# Altium PCB ControleSTM.PcbDoc (part 2 of 3)
Units mm, origin at the board's own origin, x right, y up, seen from the top; angles counter-clockwise.
Board outline 69.32 x 31.88 mm, 2 copper layers (Top Layer, Bottom Layer); 62 components, 48 nets, 242 pads, 79 vias.
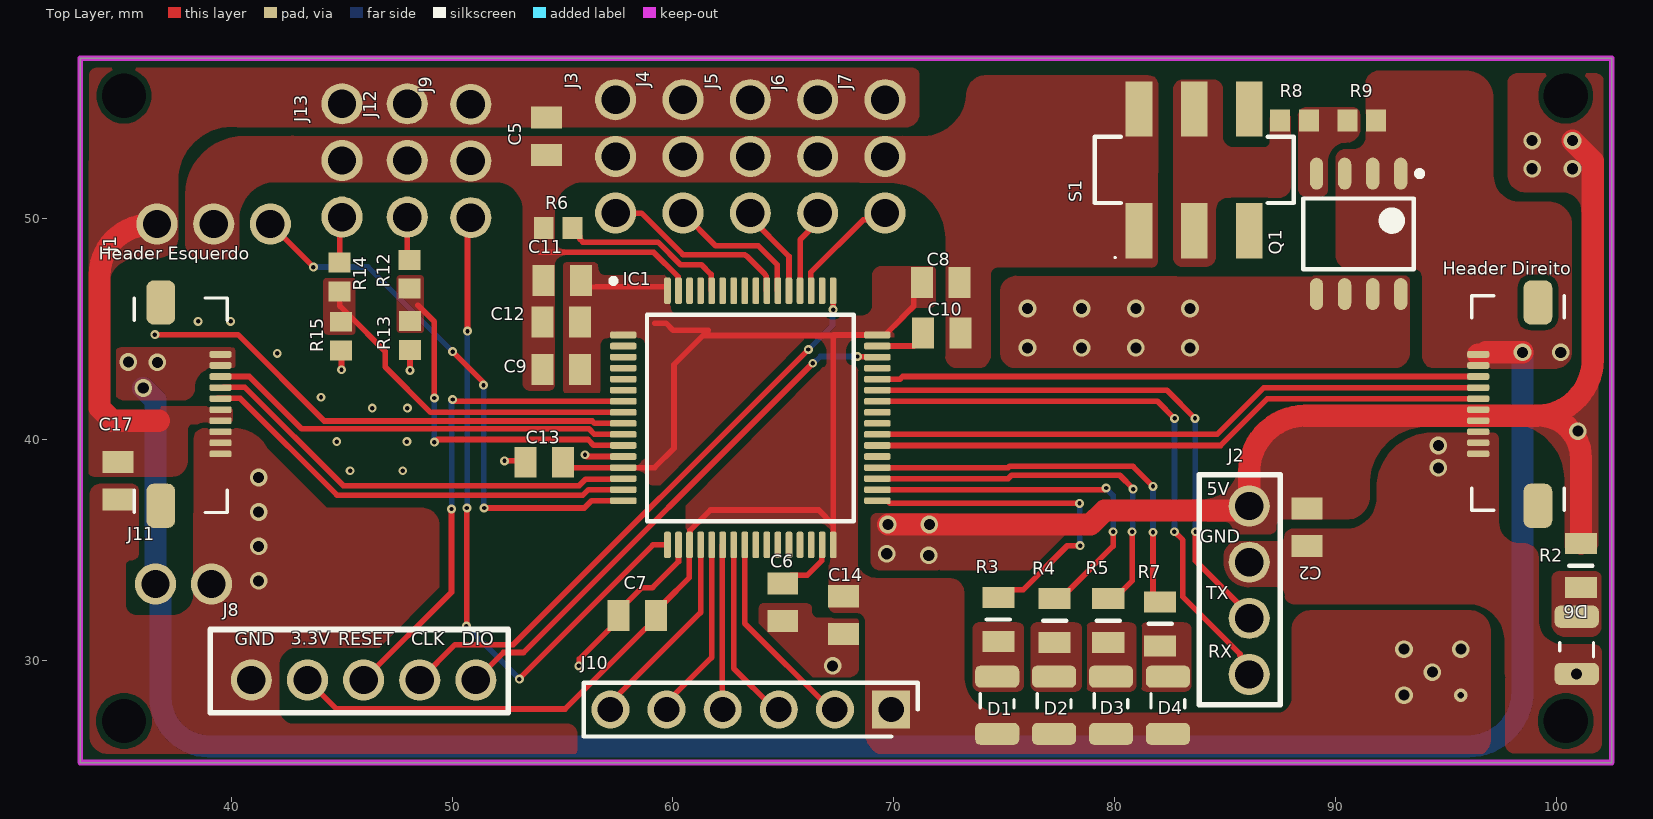
[diagram p0: Top Layer view]

## Polygon pours and split planes (outlines as drawn) (continued)
VSS on Top Layer "VSS_L01_P318" (solid, pour order 318): 94.55,40.362 ccw(c94.531,40.056) 94.225,40.075 94.225,38.515 cw(c91.685,38.515) 91.685,35.975 88.05,35.975 ccw(c88.05,35.6) 87.675,35.6 cw(c87.5,35.6) 87.5,35.425 85.625,35.425 ccw(c85.625,34.725) 84.925,34.725 84.925,34.475 ccw(c86.075,34.475) 86.075,33.325 87.35,33.325 cw(c87.35,32.975) 87.7,32.975 ccw(c88.075,32.95) 88.05,32.575 96.05,32.575 cw(c95.98,30.918) 97.638,30.848 ccw(c97.638,31.511) 98.3,31.511 98.3,34.05 cw(c98.3,34.966) 97.384,34.966 97.384,40.016 ccw(c97.037,40.016) 97.037,40.362
5V on Top Layer "5V_L01_P317" (solid, pour order 317): 84.175,36.3 84.925,36.3 cw(c84.925,35.85) 85.375,35.85 ccw(c85.5,35.85) 85.5,35.725 87,35.725 ccw(c87,36.025) 87.3,36.025 87.3,36.075 cw(c87.625,36.075) 87.625,36.4 90.5,36.4 ccw(c90.5,37.425) 91.525,37.425 91.525,37.91 cw(c94.132,37.993) 94.05,40.6 94.075,40.45 94.075,41.5 ccw(c94.05,41.5) 94.05,41.525 88.175,41.525 ccw(c88.175,41.5) 88.15,41.5 85.625,39 cw(c83.925,39) 83.925,37.3 83.35,37.3
VSS on Top Layer "VSS_L01_P316" (solid, pour order 316): 68.4,31.775 ccw(c68.225,31.775) 68.225,31.95 66.575,31.95 cw(c66.575,32.25) 66.275,32.25 66.275,32.4 ccw(c66.075,32.4) 66.075,32.6 64.075,32.6 ccw(c64.075,32.4) 63.875,32.4 63.875,31.7 66.325,29.25 67.95,29.25 ccw(c67.95,29.7) 68.4,29.7
VDD on Top Layer "VDD_L01_P315" (solid, pour order 315): 59.423,37.949 59.076,37.949 cw(c59.076,38.15) 58.875,38.15 ccw(c58.425,38.15) 58.425,38.6 58.175,38.6 cw(c58.175,38.725) 58.05,38.725 58.225,38.9 ccw(c58.113,39.712) 58.925,39.825 cw(c59.075,39.825) 59.075,39.975 59.8,39.975
VDD on Top Layer "VDD_L01_P314" (solid, pour order 314): 68.25,34.75 ccw(c69.25,34.75) 69.25,33.75 69.625,33.75 69.625,33.325 cw(c69.25,33.325) 69.25,32.95 cw(c69.25,34.801) 67.399,34.801 67.399,34.891
VDD on Top Layer "VDD_L01_P310" (solid, pour order 310): 68.6,44.625 68.475,44.625 ccw(c68.431,44.024) 67.83,44.067 67.125,43.875 ccw(c66.4,43.875) 66.4,44.6 65.575,44.6 cw(c65.575,44.719) 65.456,44.719 65.456,45.085 69.74,45.085 70.025,44.8 70.025,44.65
5V on Top Layer "5V_L01_P301" (solid, pour order 301): 72,36.675 69.2,36.675 ccw(c69.2,36.425) 68.95,36.425 68.95,34.525 ccw(c69.375,34.525) 69.375,34.1 71.9,34.1 ccw(c71.9,34.525) 72.325,34.525 72.325,34.675 cw(c73.325,34.675) 73.325,35.675 ccw(c73.325,35.975) 73.625,35.975 73.625,36.6
VSS on Top Layer "VSS_L01_P292" (solid, pour order 292): 33.6,37.025 33.6,37.475 cw(c34.15,37.475) 34.15,38.025 35.475,38.025 cw(c35.475,37.675) 35.825,37.675 35.825,34.9 cw(c35.475,34.9) 35.475,34.55 ccw(c35.475,34.3) 35.225,34.3 35.225,32.575 ccw(c35.725,32.575) 35.725,32.075 37.2,32.075 ccw(c37.325,33.05) 38.3,32.925 38.3,36.675 38.95,36.7 cw(c38.95,34.6) 41.05,34.6 41.05,29.713 cw(c39.564,29.713) 39.564,28.227 36.548,28.227 cw(c36.548,28.9) 35.875,28.9 ccw(c34.95,28.9) 34.95,29.825 34.375,29.825 cw(c34.375,30.6) 33.6,30.6 33.6,32.175
5V on Top Layer "5V_L01_P291" (solid, pour order 291): 38.031,40.429 38.031,39.056 cw(c37.3,39.056) 37.3,38.325 33.875,38.325 cw(c33.875,38.725) 33.475,38.725 33.475,41.875 cw(c33.912,41.888) 33.9,42.325 34,42.475 cw(c34,42.05) 34.425,42.05 ccw(c35.425,42.05) 35.425,41.05 36.075,41.05
5V on Top Layer "5V_L01_P289" (solid, pour order 289): 33.45,47.85 33.45,51.975 cw(c35.325,51.975) 35.325,53.85 35.6,53.85 ccw(c35.6,55.45) 37.2,55.45 37.2,55.7 cw(c38.35,55.7) 38.35,56.85 70.8,56.85 cw(c70.8,56.5) 71.15,56.5 71.15,54.775 cw(c70.525,54.775) 70.525,54.15 40.275,54.15 ccw(c40.012,51.75) 37.612,52.012 37.612,49.188 cw(c36.65,49.187) 36.65,48.225 35.75,48.225 ccw(c35.75,46.925) 34.45,46.925 ccw(c34.2,46.925) 34.2,47.175 33.65,47.175
5V on Top Layer "5V_L01_P287" (solid, pour order 287): 37.374,41.529 36.879,41.529 ccw(c36.879,41.475) 36.825,41.475 cw(c36.7,41.475) 36.7,41.35 35.825,41.35 35.825,40.375 37.925,40.375 ccw(c37.925,40.5) 38.05,40.5 cw(c38.266,40.5) 38.266,40.716 38.636,40.716 cw(c38.636,41.002) 38.35,41.002 38.35,41.225
5V on Top Layer "5V_L01_P277" (solid, pour order 277): 101.879,43.688 101.879,35.331 cw(c101.397,35.331) 101.397,34.849 100.711,34.849 cw(c100.711,35.204) 100.355,35.204 100.355,38.202 ccw(c97.815,38.202) 97.815,40.742 96.393,40.742 cw(c96.393,41.148) 95.987,41.148 cw(c96.368,41.148) 96.368,41.529 99.187,41.529 ccw(c99.187,43.739) 101.397,43.739
VDD on Top Layer "VDD_L01_P252" (solid, pour order 252): 58.403,44.635 cw(c58.403,44.288) 58.75,44.288 58.75,38.862 ccw(c58.862,38.862) 58.862,38.75 59.172,38.75 59.325,37.85 65.987,44.6 65.456,45.085 60.081,45.085 59.708,45.458 59.589,45.339 58.471,45.339
NetR8_1 on Top Layer "NETR8_1_L01_P242" (solid, pour order 242): 87.005,54.518 cw(c87.183,54.518) 87.183,54.696 87.843,54.696 cw(c87.843,54.569) 87.97,54.569 87.97,51.521 cw(c87.411,51.521) 87.411,50.962 85.1,50.962 ccw(c85.1,50.429) 84.567,50.429 84.567,48.321 cw(c84.084,48.321) 84.084,47.838 83.043,47.838 cw(c83.043,48.245) 82.636,48.245 82.636,55.865 cw(c83.068,55.865) 83.068,56.296 84.49,56.296 cw(c84.49,55.915) 84.871,55.915 84.871,53.731 ccw(c85.354,53.731) 85.354,53.248 86.744,53.248 ccw(c86.751,53.503) 87.005,53.496
VSS on Top Layer "VSS_L01_P041" (solid, pour order 41): 70.325,53.75 cw(c70.391,53.097) 71.044,53.162 71.044,52.095 cw(c70.612,52.095) 70.612,51.664 41.326,51.664 cw(c41.326,52.451) 40.538,52.451 40.538,53.061 cw(c41.164,53.124) 41.1,53.75
VSS on Top Layer "VSS_L01_P226" (solid, pour order 226): 42.727,51.717 42.275,51.675 ccw(c42.08,49.97) 40.375,50.165 40.375,48.825 cw(c39.725,48.825) 39.725,48.175 38.675,48.175 cw(c38.675,48.925) 37.925,48.925 37.925,50.925 cw(c40.613,51.062) 40.475,53.75 42.65,53.75 cw(c42.772,53.095) 43.427,53.217
VSS on Top Layer "VSS_L01_P251" (solid, pour order 251): 69.571,51.638 69.799,51.638 cw(c69.799,49.098) 72.339,49.098 72.339,47.574 ccw(c72.441,47.574) 72.441,47.473 74.371,47.473 cw(c74.707,47.473) 74.707,47.808 81.117,47.808 cw(c81.117,47.844) 81.081,47.844 81.081,56.508 74.187,56.508 ccw(c74.187,55.601) 73.279,55.601 cw(c71.289,55.74) 71.15,53.75 70.325,53.75
VSS on Top Layer "VSS_L01_P188" (solid, pour order 188): 80.366,55.347 cw(c78.854,55.181) 79.019,53.67 69.164,53.67 ccw(c69.164,52.781) 68.275,52.781 68.275,51.867 ccw(c68.504,51.867) 68.504,51.638 79.019,51.638 cw(c79.019,50.292) 80.366,50.292 ccw(c80.89,51.034) 81.509,50.368 81.509,55.347
VSS on Top Layer "VSS_L01_P142" (solid, pour order 142): 81.514,56.502 80.649,56.515 ccw(c80.643,56.169) 80.298,56.168 80.321,48.146 ccw(c80.645,48.147) 80.635,47.824 81.598,47.793 ccw(c81.609,48.133) 81.949,48.132 81.972,56.036 ccw(c81.507,56.037)
NetC1_2 on Top Layer "NETC1_2_L01_P197" (solid, pour order 197): 90.068,47.396 93.167,47.396 cw(c93.167,47.219) 93.345,47.219 93.345,43.967 cw(c92.608,43.967) 92.608,43.231 75.565,43.231 cw(c75.565,43.993) 74.803,43.993 74.803,46.685 cw(c75.54,46.685) 75.54,47.422
5V on Top Layer "5V_L01_P247" (solid, pour order 247): 36.982,40.716 cw(c36.982,41.123) 36.576,41.123 37.008,41.123 ccw(c37.008,41.326) 37.211,41.326 cw(c37.414,41.326) 37.414,41.529 39.98,41.529 cw(c39.98,41.427) 40.081,41.427 40.081,40.894 cw(c39.903,40.894) 39.903,40.716
VSS on Top Layer "VSS_L01_P201" (solid, pour order 201): 74.371,47.473 ccw(c73.939,47.473) 73.939,47.904 72.669,47.904 ccw(c72.669,47.574) 72.339,47.574 72.339,43.84 ccw(c72.93,43.809) 72.898,43.218 73.749,43.218 ccw(c73.749,43.84) 74.371,43.84
VSS on Top Layer "VSS_L01_P215" (solid, pour order 215): 39.225,40.521 38.785,40.521 ccw(c38.785,40.049) 38.314,40.049 38.314,29.614 ccw(c39.7,29.614) 39.7,28.227 41.256,28.227 ccw(c41.256,28.811) 41.841,28.811 41.841,38.837 ccw(c40.157,38.837) 40.157,40.521
NetC1_2 on Top Layer "NETC1_2_L01_P157" (solid, pour order 157): 88.824,47.219 cw(c89.027,47.219) 89.027,47.422 93.142,47.422 cw(c93.142,47.219) 93.345,47.219 93.345,46.025 cw(c93.091,46.025) 93.091,45.771 88.925,45.771 cw(c88.925,45.872) 88.824,45.872
NetQ1_G on Top Layer "NETQ1_G_L01_P169" (solid, pour order 169): 90.755,55.061 cw(c90.755,54.705) 91.11,54.705 91.11,54.095 cw(c90.475,54.095) 90.475,53.46 ccw(c90.475,52.622) 89.637,52.622 89.637,51.352 cw(c89.282,51.352) 89.282,50.997 88.748,50.997 cw(c88.697,51.403) 88.291,51.352 88.291,54.629 cw(c88.697,54.654) 88.671,55.061
VDD on Top Layer "VDD_L01_P154" (solid, pour order 154): 56.896,47.461 cw(c56.914,47.759) 56.617,47.777 56.617,47.828 ccw(c56.413,47.828) 56.413,48.031 55.194,48.031 ccw(c55.194,47.879) 55.042,47.879 55.042,42.291 ccw(c55.321,42.291) 55.321,42.012 56.439,42.012 ccw(c56.439,42.291) 56.718,42.291 56.718,44.323 cw(c56.998,44.323) 56.998,44.602 58.268,44.602 ccw(c58.268,46.228) 59.893,46.228 59.893,47.234 ccw(c59.573,47.141) 59.48,47.461
VSS on Bottom Layer "VSS_L02_P302" (solid, pour order 302): 52.425,47.65 52.425,33.3 cw(c51.538,33.112) 51.725,32.225 38.8,32.225 cw(c38.8,33.125) 37.9,33.125 37.9,46.95 cw(c38.725,46.95) 38.725,47.775 ccw(c38.725,48.075) 39.025,48.075 39.025,48.935 cw(c41.565,48.935) 41.565,51.475 53.2,51.475
VSS on Bottom Layer "VSS_L02_P349" (solid, pour order 349): 83.795,41.478 83.947,41.478 cw(c83.947,41.046) 84.379,41.046 84.379,40.945 ccw(c84.633,40.945) 84.633,40.691 86.512,40.691 ccw(c86.589,41.152) 87.05,41.076 87.05,42.65 85.518,42.65 cw(c85.518,42.951) 85.217,42.951
5V on Bottom Layer "5V_L02_P347" (solid, pour order 347): 97.13,52.713 97.13,47.854 ccw(c98.171,47.854) 98.171,46.812 101.397,46.812 ccw(c101.397,47.498) 102.083,47.498 102.083,51.348
5V on Bottom Layer "5V_L02_P345" (solid, pour order 345): 95.225,54.127 95.936,54.127 cw(c95.936,52.934) 97.13,52.934 ccw(c99.365,52.934) 99.365,50.698 101.346,50.698 ccw(c101.346,51.46) 102.108,51.46 102.108,55.982 ccw(c101.371,55.982) 101.371,56.718 93.472,56.718 cw(c93.447,56.718) 93.447,56.693
VSS on Bottom Layer "VSS_L02_P304" (solid, pour order 304): 76.889,42.95 81.775,42.95 cw(c81.775,42.55) 82.175,42.55 82.175,39.075 cw(c81.4,39.075) 81.4,38.3 78.975,38.3 ccw(c78.975,36.8) 77.475,36.8 cw(c77.475,38.55) 75.725,38.55 75.725,40.175
VSS on Bottom Layer "VSS_L02_P305" (solid, pour order 305): 73.825,32.05 cw(c72.275,32.05) 72.275,30.5 54.462,30.5 cw(c54.462,32.646) 52.316,32.646 ccw(c51.737,32.646) 51.737,33.225 38,33.225 ccw(c38,33.125) 37.9,33.125 37.9,28.75 ccw(c39.525,28.75) 39.525,27.125 76.04,27.125 cw(c76.04,27.05) 76.115,27.05 76.115,31.635 ccw(c75.525,31.635) 75.525,32.225
NetC1_2 on Bottom Layer "NETC1_2_L02_P309" (solid, pour order 309): 83.825,44.025 cw(c83.3,44.025) 83.3,43.5 74.45,43.5 ccw(c74.45,42.65) 73.6,42.65 73.6,41.525 cw(c73.175,41.525) 73.175,41.1 69.925,41.1 cw(c69.925,41.825) 69.2,41.825 69.2,44.025 ccw(c67.425,44.025) 67.425,45.8 57.675,45.8 ccw(c57.675,44.875) 56.75,44.875 56.75,41.725 cw(c56.05,41.725) 56.05,41.025 53.15,41.025 cw(c53.15,41.5) 52.675,41.5 52.675,46.65 cw(c54.35,46.65) 54.35,48.325 82.85,48.325 cw(c82.85,47.35) 83.825,47.35
5V on Bottom Layer "5V_L02_P288" (solid, pour order 288): 91.549,56.711 69.211,56.711 ccw(c69.211,55.85) 68.35,55.85 68.35,54.675 ccw(c68.925,54.7) 68.95,54.125 92.6,54.125
VSS on Bottom Layer "VSS_L02_P276" (solid, pour order 276): 52.19,47.615 52.19,47.72 cw(c53.569,47.72) 53.569,49.098 85.598,49.098 cw(c85.598,48.209) 86.487,48.209 ccw(c87.528,48.209) 87.528,47.168 95.969,47.391 ccw(c96.016,48.086) 96.71,48.039 96.71,52.769 ccw(c95.606,52.769) 95.606,53.873 41.58,53.873 ccw(c41.338,51.575) 39.04,51.816 39.04,46.914 ccw(c41.58,46.914) 41.58,44.374 45.06,44.374
5V on Bottom Layer "5V_L02_P271" (solid, pour order 271): 91.669,54.127 98.069,54.127 ccw(c98.069,54.661) 98.603,54.661 98.603,56.109 ccw(c97.993,56.109) 97.993,56.718 91.567,56.718 ccw(c91.567,56.693) 91.542,56.693
VSS on Bottom Layer "VSS_L02_P303" (solid, pour order 303): 52.4,42.6 52.4,41.325 ccw(c52.975,41.325) 52.975,40.75 56.525,40.75 ccw(c56.525,41.4) 57.175,41.4 57.175,44.775 cw(c57.725,44.775) 57.725,45.325 65.575,45.325 cw(c65.575,45.025) 65.875,45.025 65.875,43.215 ccw(c68.415,43.215) 68.415,40.675 73.45,40.675 ccw(c73.45,41.225) 74,41.225 74,42.375 cw(c74.575,42.375) 74.575,42.95 76.825,42.95 cw(c76.825,42.3) 77.475,42.3 77.475,35.5 ccw(c78.3,35.5) 78.3,34.675 83.65,34.675 ccw(c83.65,35.125) 84.1,35.125 cw(c84.552,35.125) 84.552,35.577 88.737,35.577 cw(c88.737,33.037) 91.277,33.037 91.277,28.052 cw(c90.275,28.052) 90.275,27.05 76.365,27.05 cw(c76.365,29.59) 73.825,29.59 73.825,37.575 ccw(c73.275,37.575) 73.275,38.125 68.05,38.125 ccw(c68.05,37.25) 67.175,37.25 67.175,35.75 cw(c65.45,35.75) 65.45,34.025 57.65,34.025 cw(c57.65,34.9) 56.775,34.9 56.775,37.3 ccw(c55.85,37.3) 55.85,38.225 52.887,38.225 ccw(c52.887,37.691) 52.353,37.691 cw(c52.353,38.069) 51.975,38.069 51.975,39.575
NetD5_A on Bottom Layer "NETD5_A_L02_P208" (solid, pour order 208): 93.548,35.433 cw(c93.548,35.204) 93.777,35.204 93.777,32.487 cw(c93.447,32.487) 93.447,32.156 92.278,32.156 cw(c92.278,32.512) 91.923,32.512 91.923,35.077 cw(c92.278,35.077) 92.278,35.433
VSS on Bottom Layer "VSS_L02_P175" (solid, pour order 175): 90.754,35.687 85.776,35.687 ccw(c85.776,34.722) 84.811,34.722 84.811,33.934 ccw(c85.598,33.934) 85.598,33.147 86.868,33.147 cw(c86.868,31.979) 88.036,31.979 ccw(c88.57,31.979) 88.57,31.445 90.602,31.445 ccw(c90.602,32.207) 91.364,32.207 91.364,35.255 ccw(c90.919,35.242) 90.907,35.687
5V on Bottom Layer "5V_L02_P319" (solid, pour order 319): 33.575,51.7 33.575,49.85 ccw(c35.225,49.85) 35.225,48.2 37.4,48.2 ccw(c37.4,49.55) 38.75,49.55 38.75,52.65 cw(c40.25,52.65) 40.25,54.15 71.125,54.15 ccw(c71.125,55.325) 72.3,55.325 72.3,55.875 ccw(c71.475,55.875) 71.475,56.7 38.325,56.7 ccw(c38.325,55.55) 37.175,55.55 37.175,55.35 cw(c35.7,55.35) 35.7,53.875 35.425,53.875 ccw(c35.425,51.975) 33.525,51.975
VDD on Bottom Layer "VDD_L02_P308" (solid, pour order 308): 93.85,46.25 ccw(c93.35,46.25) 93.35,46.75 87.95,46.75 ccw(c87.95,46.175) 87.375,46.175 87.375,41.3 ccw(c87.875,41.3) 87.875,40.8 88.325,40.8 cw(c88.325,40.05) 89.075,40.05 89.075,36.625 ccw(c89.725,36.625) 89.725,35.975 93.175,35.975 cw(c93.175,35.05) 94.1,35.05 94.1,35.052 cw(c94.666,35.052) 94.666,37.592 92.133,37.592 cw(c92.133,38.225) 91.5,38.225 91.5,40.325 cw(c91.9,40.325) 91.9,40.725 96.425,40.725 ccw(c96.425,41.1) 96.8,41.1 96.8,42.275 ccw(c96.225,42.275) 96.225,42.85 94.525,42.85 cw(c94.525,43.525) 93.85,43.525
VSS on Bottom Layer "VSS_L02_P307" (solid, pour order 307): 87.528,47.168 ccw(c87.528,46.689) 87.05,46.689 87.05,42.65 cw(c85.873,42.65) 85.873,41.473 82.835,41.473 ccw(c82.835,40.813) 82.175,40.812 cw(c82.175,41.133) 81.855,41.133 81.855,42.95 83.3,42.95 ccw(c83.3,43.925) 84.275,43.925 84.275,47.5 ccw(c83.113,47.5) 83.112,48.662 53.92,48.662 ccw(c53.92,47.168) 52.425,47.168 cw(c52.476,49.015) 51.761,47.311 52.025,49.925 cw(c52.2,49.925) 52.2,50.1 87.5,50.1
VSS on Bottom Layer "VSS_L02_P306" (solid, pour order 306): 65.875,43.65 ccw(c66.425,43.65) 66.425,43.1 68.2,43.1 cw(c68.2,42.85) 68.45,42.85 68.45,41.959 ccw(c69.734,41.959) 69.734,40.675 cw(c69.134,40.675) 69.134,40.075 64.375,40.075
5V on Bottom Layer "5V_L02_P299" (solid, pour order 299): 73.35,37.55 ccw(c72.975,37.55) 72.975,37.925 68.425,37.925 ccw(c68.425,37.225) 67.725,37.225 67.725,34.35 cw(c66.725,34.35) 66.725,33.35 57.225,33.35 cw(c57.225,34.3) 56.275,34.3 56.275,37.475 ccw(c55.9,37.475) 55.9,37.85 52.95,37.85 ccw(c52.95,37.475) 52.575,37.475 52.575,32.575 ccw(c54.125,32.65) 54.2,31.1 71.875,31.1 ccw(c71.875,32.575) 73.35,32.575
BAT on Bottom Layer "BAT_L02_P296" (solid, pour order 296): 34,45.5 ccw(c34,45.061) 33.561,45.061 33.561,36.549 ccw(c33.81,36.549) 33.81,36.3 36.375,36.3 ccw(c36.375,36.9) 36.975,36.9 36.975,42.625 ccw(c35.58,42.625) 35.58,44.02 34.853,44.02